# EAGLE board YunShield.v1.0 (EAGLE 6.1)
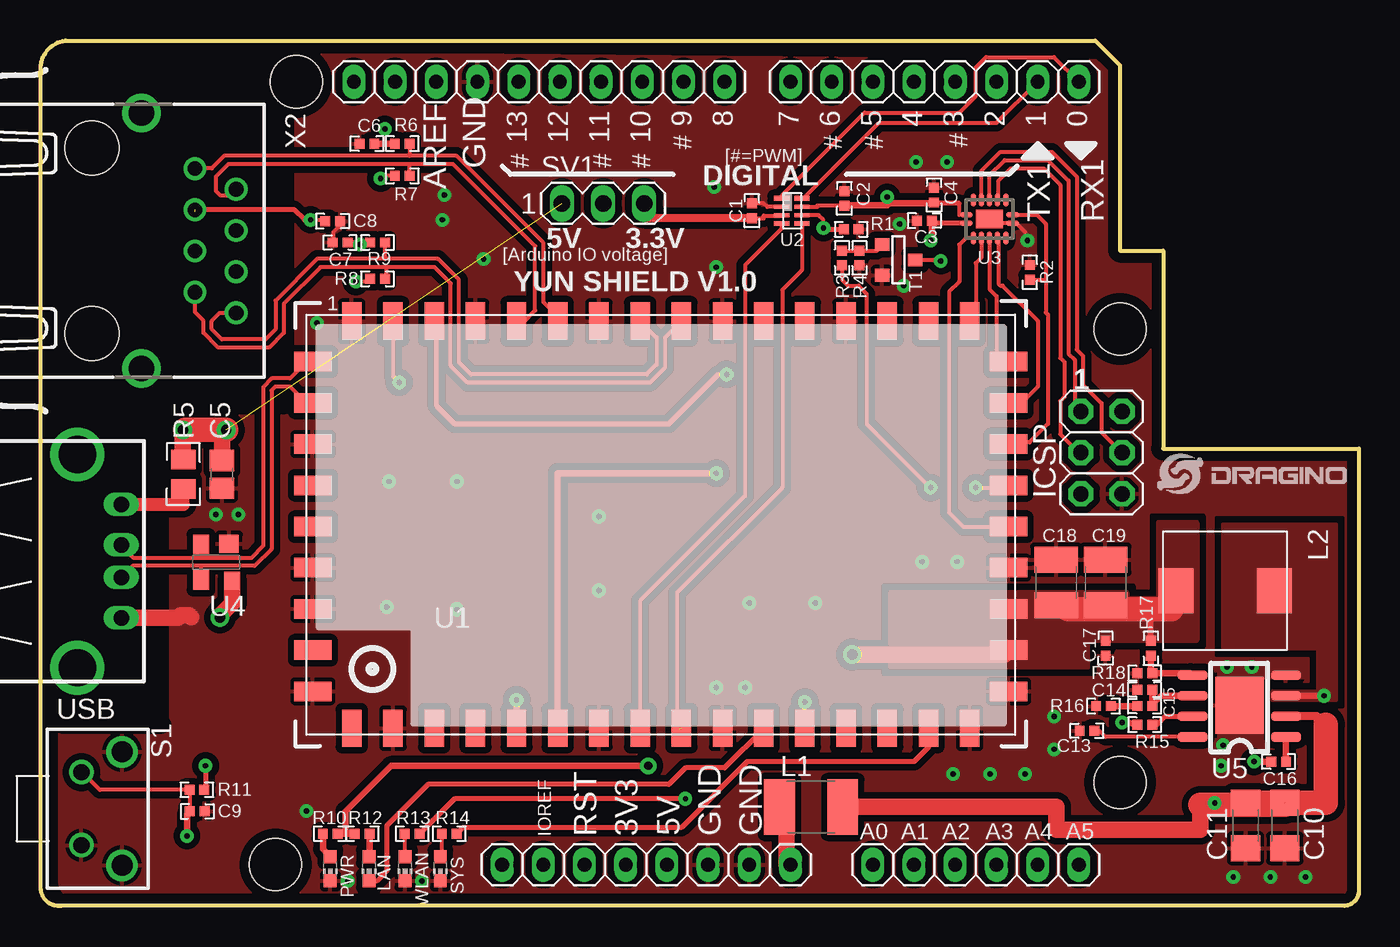
[diagram p0: board, top side]
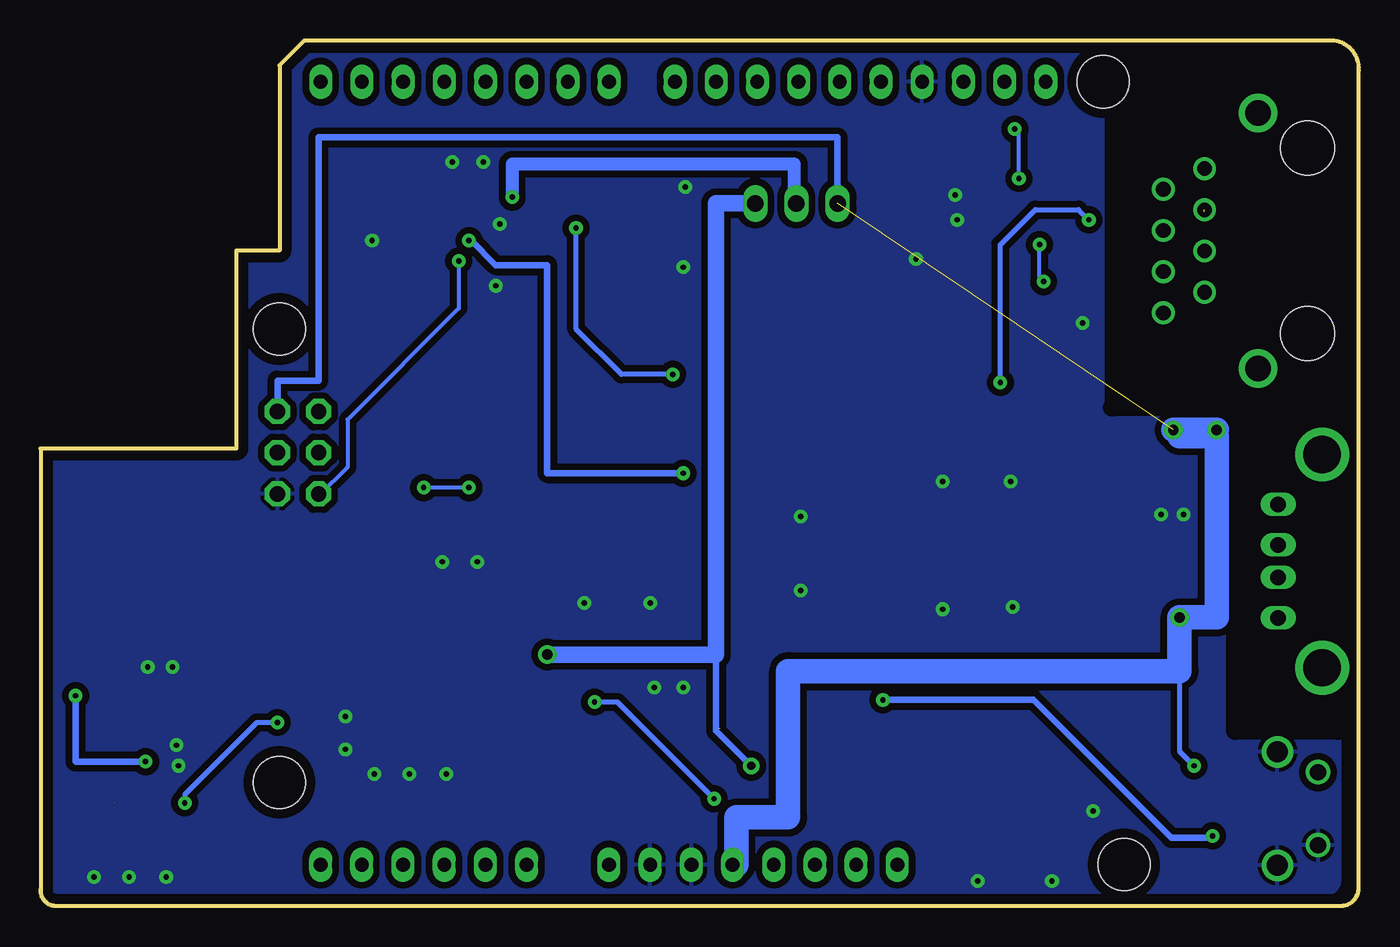
[diagram p1: board, bottom side, seen from below]

Size 81.3 x 53.35 mm. Coordinates in mm from the lower left corner, seen from the top.
Outline: 65.04,53.35 66.56,51.82 66.56,40.39 69.23,40.39 69.23,28.2 81.3,28.2 81.3,1.02 arc-90 80.41,0.01 1.27,0.01 arc-90 0.02,1.02 0.02,51.35 arc-90 1.52,53.35 65.04,53.35
Copper layers (1*16): Top 0.035mm / dielectric 1.5mm / Bottom 0.035mm
Design rules: minimum track width 10mil, minimum drill 22mil, track to track 10mil, track to pad 10mil, pad to pad 8mil, via to via 12mil, smd to smd 8mil, copper to edge 24mil, drill to drill 12mil, minimum pad ring 10mil, minimum via ring 10mil, stop-mask expansion 2mil, vias tented up to drill 30mil, thermal gap 10mil
Net classes: 0 default: width 0.254 mm, drill 0.61 mm, clearance 0.254 mm; 1 power: width 0.254 mm, drill 0.61 mm, clearance 0.254 mm; 2 gnd: width 0.254 mm, drill 0.61 mm, clearance 0.254 mm; 3 usbvcc: width 0.254 mm, drill 0.61 mm, clearance 0.254 mm; 4 aref: width 0.254 mm, drill 0.61 mm, clearance 0.254 mm; 5 usbtrace: width 0.254 mm, clearance 0.152 mm
Holes 3.2 mm at 66.56,35.57 66.56,7.63 15.76,50.81 14.49,2.55
tRestrict: area 1.2,11.2 to 15.1,52.6
bRestrict: area 1.2,10.8 to 15.3,52.6
vRestrict: area 43.1,38.6 to 43.6,38.9; area 36.3,35.2 to 37,35.7; area 45,35.2 to 45.7,35.7; area 41.8,35.2 to 42.3,35.7; area 48.4,10.3 to 49,10.8; area 50.9,10.2 to 51.5,11.1

## Footprints (pad centres in the part's own frame; a part is rotated, then mirrored left to right if it is on the bottom)
C0402 = smd 0.61 x 0.61: 1 -0.457,0; 2 0.457,0
C0805 = smd 1.3 x 1.5: 1 -0.85,0; 2 0.85,0
C1206 = smd 1.6 x 1.8: 1 -1.4,0; 2 1.4,0
C1210 = smd 1.6 x 2.7: 1 -1.4,0; 2 1.4,0
2X03 = drill 0.95 pad 1.55 octagon: 1 -2.54,-1.27; 2 -2.54,1.27; 3 0,-1.27; 4 0,1.27; 5 2.54,-1.27; 6 2.54,1.27
1X08 = drill 0.85 pad 1.422 long: 1 -8.89,0; 2 -6.35,0; 3 -3.81,0; 4 -1.27,0; 5 1.27,0; 6 3.81,0; 7 6.35,0; 8 8.89,0
1X06 = drill 0.85 pad 1.422 long: 1 -6.35,0; 2 -3.81,0; 3 -1.27,0; 4 1.27,0; 5 3.81,0; 6 6.35,0
1X10 = drill 0.85 pad 1.422 long: 1 -11.43,0; 2 -8.89,0; 3 -6.35,0; 4 -3.81,0; 5 -1.27,0; 6 1.27,0; 7 3.81,0; 8 6.35,0; 9 8.89,0; 10 11.43,0
L1812 = smd 1.9 x 3.4: 1 -1.95,0; 2 1.95,0
INDUCTOR-74 = smd 2.794 x 2.159: P$1 0,3.048; P$2 0,-3.048
CHIP-LED0603 = smd 0.8 x 0.8: A 0,-0.75; C 0,0.75
R0402 = smd 0.61 x 0.61: 1 -0.457,0; 2 0.457,0
R0805 = smd 1.2 x 1.5: 1 -0.9,0; 2 0.9,0
SWITCH_6X6X5 = drill 0.991 pad 1.524: 1 -2.25,0; 2 2.25,0 | drill 1.295 pad 1.905: 3 3.5,2.5; 4 -3.5,2.5
MA03-1 = drill 1.016 long: 1 -2.54,0; 2 0,0; 3 2.54,0
SOT-23 = smd 0.787 x 0.889: 1 0,-1.016; 2 -0.95,1.016; 3 0.95,1.016
HE50 = smd 1.2 x 2.3: 1 -19.05,12.55; 2 -16.51,12.55; 3 -13.97,12.55; 4 -11.43,12.55; 5 -8.89,12.55; 6 -6.35,12.55; 7 -3.81,12.55; 8 -1.27,12.55; 9 1.27,12.55; 10 3.81,12.55; 11 6.35,12.55; 12 8.89,12.55; 13 11.43,12.55; 14 13.97,12.55; 15 16.51,12.55; 16 19.05,12.55; 26 19.05,-12.55; 27 16.51,-12.55; 28 13.97,-12.55; 29 11.43,-12.55; 30 8.89,-12.55; 31 6.35,-12.55; 32 3.81,-12.55; 33 1.27,-12.55; 34 -1.27,-12.55; 35 -3.81,-12.55; 36 -6.35,-12.55; 37 -8.89,-12.55; 38 -11.43,-12.55; 39 -13.97,-12.55; 40 -16.51,-12.55; 41 -19.05,-12.55 | smd 2.3 x 1.2: 17 21.45,10.05; 18 21.45,7.51; 19 21.45,4.97; 20 21.45,2.43; 21 21.45,-0.11; 22 21.45,-2.65; 23 21.45,-5.19; 24 21.45,-7.73; 25 21.45,-10.27; 42 -21.45,-10.27; 43 -21.45,-7.73; 44 -21.45,-5.19; 45 -21.45,-2.65; 46 -21.45,-0.11; 47 -21.45,2.43; 48 -21.45,4.97; 49 -21.45,7.51; 50 -21.45,10.05
NXP-SOT833-1 = smd 1 x 0.3: 1 -0.614,0.778 | smd 0.95 x 0.25: 2 -0.639,0.253; 3 -0.639,-0.247; 6 0.611,-0.247; 7 0.611,0.253 | smd 0.95 x 0.3: 4 -0.639,-0.772; 5 0.611,-0.772; 8 0.611,0.778
DHVQFN14 = smd 0.8 x 0.35: 1 -1.425,-0.25; 7 1.425,-0.25; 8 1.425,0.25; 14 -1.425,0.25 | smd 0.35 x 0.8: 2 -1,-1.175; 3 -0.5,-1.175; 4 0,-1.175; 5 0.5,-1.175; 6 1,-1.175; 9 1,1.175; 10 0.5,1.175; 11 0,1.175; 12 -0.5,1.175; 13 -1,1.175 | smd 1.65 x 1.15: EXP 0,0
SOT143 = smd 1.194 x 1.118: 1 -0.72,-1.181 | smd 0.991 x 1.194: 2 1.007,-1.143; 3 1.007,1.067 | smd 0.991 x 1.118: 4 -0.923,1.105
RT8250-SOP8 = smd 1.88 x 0.61: 1 -1.219,0; 2 -1.219,-1.27; 3 -1.219,-2.54; 4 -1.219,-3.81; 5 4.547,-3.81; 6 4.547,-2.54; 7 4.547,-1.27; 8 4.547,0 | smd 2.997 x 3.505: 9 1.651,-1.956
PN87520 = drill 0.95 long: 1 -3.5,2.71; 2 -1,2.71; 3 1,2.71; 4 3.5,2.71 | drill 2.3: P$1 -6.57,0; P$2 6.57,0
RJ111BE = drill 0.9 pad 1.3: 1 -4.445,0; 2 -3.175,2.54; 3 -1.905,0; 4 -0.635,2.54; 5 0.635,0; 6 1.905,2.54; 7 3.175,0; 8 4.445,2.54 | drill 1.6 pad 2.184: M1 -7.875,-3.3; M2 7.875,-3.3 | hole 3.3: 5.715,-6.35; -5.715,-6.35

## Placement (x,y rotation side)
C1  0.1uF  [C0402]  43.87,42.85 270 top
C2  0.1uF  [C0402]  49.57,43.61 270 top
C3  0.1uF  [C0402]  54.5,42.25 0 top
C4  0.1uF  [C0402]  55.09,43.82 270 top
C5  10uF, 10V  [C0805]  11.19,26.61 270 top
C6  0.1u 10v  [C0402]  20.13,47 180 top
C7  0.1u 10v  [C0402]  18.47,40.9 180 top
C8  0.1u 10v  [C0402]  18.01,42.22 0 top
C9  0.1u NL  [C0402]  9.66,5.83 0 top
C10  10uF 25V  [C1206]  76.72,4.96 90 top
C11  10uF 25v NL  [C1206]  74.31,4.96 90 top
C13  0.1u 10V  [C0402]  64.53,10.8 180 top
C14  NL  [C0402]  68.09,13.34 180 top
C15  3900pF 25V  [C0402]  68.09,12.33 180 top
C16  0.01uF 16V  [C0402]  76.34,8.9 180 top
C17  NL  [C0402]  65.67,15.88 270 top
C18  22uF  [C1210]  62.63,19.95 90 top
C19  22uF  [C1210]  65.67,19.95 90 top
ICSP  ICSP  [2X03]  65.42,27.95 270 top
J2  8x1F-H8.5  [1X08]  55.13,50.81 180 top
J3  8x1F-H8.5  [1X08]  37.35,2.55 0 top
J4  6x1F-H8.5  [1X06]  57.67,2.55 0 top
JP1  10x1F-H8.5  [1X10]  30.75,50.81 180 top
L1  500ma  [L1812]  47.51,6.1 0 top
L2  10uH  [INDUCTOR-74]  73.04,19.44 270 top
LAN  Yellow  [CHIP-LED0603]  20.26,2.29 180 top
PWR  Yellow  [CHIP-LED0603]  17.87,2.29 180 top
R1  10k  [R0402]  49.99,41.71 180 top
R2  10k  [R0402]  61,39.06 270 top
R3  47k  [R0402]  49.43,39.94 270 top
R4  47k  [R0402]  50.51,39.94 270 top
R5  PTC  [R0805]  8.8,26.61 270 top
R6  49.9R  [R0402]  22.31,47 0 top
R7  49.9R  [R0402]  22.31,45.01 0 top
R8  49.9R  [R0402]  20.78,38.66 0 top
R9  49.9R  [R0402]  20.78,40.9 0 top
R10  330R  [R0402]  17.87,4.45 180 top
R11  100K  [R0402]  9.64,7.17 0 top
R12  330R  [R0402]  19.84,4.45 0 top
R13  270R  [R0402]  22.91,4.45 180 top
R14  270R  [R0402]  25.2,4.45 180 top
R15  100K  [R0402]  68.09,11.18 180 top
R16  6.81K  [R0402]  65.55,12.33 0 top
R17  26.1K  [R0402]  68.47,15.88 90 top
R18  10K  [R0402]  68.09,14.36 0 top
S1  [SWITCH_6X6X5]  2.52,6.01 270 top
SV1  [MA03-1]  34.69,43.31 0 top
SYS  Yellow  [CHIP-LED0603]  24.65,2.29 180 top
T1  AP2302GN-HF/SOT23  [SOT-23]  52.9,39.82 90 top
U1  HE  [HE50]  38.24,23.5 0 top
U2  NTB0102GT  [NXP-SOT833-1]  46.34,42.84 0 top
U3  NTB0104  [DHVQFN14]  58.52,42.35 0 top
U4  YSSR05  [SOT143]  10.9,21.15 180 top
U5  RT8250  [RT8250-SOP8]  75.58,10.42 180 top
U$1  LOGO-NEW  [LOGO-SILK-NEW]  68.85,25.41 0 top
USB  [PN87520]  2.27,21.26 270 top
WLAN  Yellow  [CHIP-LED0603]  22.47,2.29 180 top
X2  RJ111BE  [RJ111BE]  9.52,41.01 270 top

## Library data of the parts
C1-C11 C13-C19 L1 L2 LAN PWR R1-R18 S1 SYS U1-U5 U$1 WLAN = dragino
ICSP J2-J4 JP1 = SmartPrj
SV1 = con-lstb; OC_FARNELL: unknown; OC_NEWARK: unknown
T1 X2 = dragino; OC_FARNELL: unknown; OC_NEWARK: unknown
USB = con-berg; OC_FARNELL: unknown; OC_NEWARK: unknown

## Nets
2.5V: C3.2 U1.36 U3.1
+3V3: C1.2 C17.1 C18.1 C19.1 L2.P$2 R10.1 R12.1 R17.2 SV1.3 U1.23 U1.24 U2.3
+5V [usbvcc]: C5.1 ICSP.2 J3.5 R5.1 R11.2 SV1.1 U4.4
/RESET: ICSP.5 T1.1
CTRL_2.0V: C8.1 U1.2 X2.3
GND [gnd]: C1.1 C2.1 C3.1 C4.1 C5.2 C6.2 C7.2 C8.2 C9.2 C10.1 C11.1 C13.2 C14.2 C17.2 C18.2 C19.2 ICSP.6 J3.6 J3.7 JP1.7 PWR.C R1.1 R2.1 R4.2 R16.1 R18.1 S1.2 S1.3 S1.4 SYS.C T1.2 U1.1 U1.4 U1.7 U1.10 U1.13 U1.22 U1.25 U1.26 U1.32 U1.35 U1.40 U1.42 U1.44 U1.45 U1.48 U2.2 U3.7 U3.EXP U4.1 U5.4 U5.9 USB.4 WLAN.C
GPIO18: U1.18 U3.5
GPIO19: R2.2 U1.19 U3.8
GPIO20: R3.2 U1.20
GPIO21: U1.16 U3.3
GPIO22: U1.17 U3.4
GPIO23: U1.21 U3.2
GPIO24: R1.2 U1.3 U2.6
GPIO28: R14.1 U1.27
JUMPSTART: C9.1 R11.1 S1.1 U1.37
LED_P0: LAN.C U1.31
LED_WLAN: R13.1 U1.30
MISO: ICSP.1 U3.11
MOSI: ICSP.4 U3.12
N$1: R3.1 R4.1 T1.3
N$2: R5.2 USB.1
N$3: C6.1 R6.1 R7.1
N$4: PWR.A R10.2
N$5: C7.1 R8.1 R9.1
N$6: LAN.A R12.2
N$8: R13.2 WLAN.A
N$9: R14.2 SYS.A
N$10: C10.2 C11.2 L1.2 R15.2 U5.2
N$13: R15.1 U5.7
N$14: R17.1 R18.2 U5.5
N$15: C13.1 U5.8
N$17: C14.1 C15.1 U5.6
N$18: C15.2 R16.2
N$20: C16.1 U5.1
N$21: C16.2 L2.P$1 U5.3
OPTIONAL_ANT: U1.41
P0_RX_N: R9.2 U1.8 X2.8
P0_RX_P: R8.2 U1.9 X2.7
P0_TX_N: R7.2 U1.5 X2.2
P0_TX_P: R6.2 U1.6 X2.1
RX: J2.1 U2.1
SCK: ICSP.3 U3.10
SS: U3.13
TX: J2.2 U2.8
UART_RX: U1.33 U2.5
UART_TX: U1.34 U2.4
USB_N [usbtrace]: U1.50 U4.2 USB.2
USB_P [usbtrace]: U1.49 U4.3 USB.3
VDC [usbvcc]: C2.2 C4.2 SV1.2 U2.7 U3.14
VIN: J3.8 L1.1

## Tracks (layer width: path | path; a pad name or v marks a point on that pad's centre or on a via)
2.5V  (via drill 0.33)
  Top 0.305: U3.1 54.96,42.1 C3.2
  Top 0.406: 54.96,42.1 54.96,41.1 v54.88,41.03 | v41.67,26.68 31.89,26.68 31.89,11.06 31.9,11.06 U1.36
  Bottom 0.406: v54.88,41.03 54.75,41.03 53.23,39.5 50.05,39.5 50.05,26.68 v41.67,26.68
+3V3  (via drill 0.51, 0.64)
  Top 0.254: C1.2 44.59,42.39 44.59,42.55 45.7,42.55 U2.3 | 19.45,4.45 R12.1 19.32,4.45
  Top 0.381: R17.2 68.47,18.29
  Top 0.406: v37.48,8.64 21.61,8.64 18.81,5.85 18.81,4.45 | 18.81,4.45 19.32,4.45 | 18.81,4.45 R10.1
  Top 0.508: C1.2 37.35,42.39 37.35,43.31 SV1.3
  Top 1.016: U1.24 59.43,15.5 v50.05,15.5
  Top 1.524: L2.P$2 69.74,19.44 69.74,18.29 68.47,18.29 63.39,18.29
  Bottom 0.406: 39.64,15.5 39.64,10.8 v37.48,8.64
  Bottom 1.016: v50.05,15.5 39.64,15.5 39.64,43.31 SV1.3
  pour Top (no thermals): 52.47,19.31 66.94,19.31 66.94,18.93 68.98,18.93 68.98,23.63 71.26,23.63 71.26,16.39 64.53,16.39 64.53,14.74 52.47,14.74
+5V  (via drill 0.33, 0.64)  (1 unrouted)
  Top 0.305: v10.18,8.64 10.18,7.12 10.15,7.12 R11.2
  Top 1.016: v11.06,17.79 11.06,17.91 11.83,18.68 U4.4 | C5.1 11.19,29.08 v11.45,29.34 | 8.91,29.34 8.78,29.22 | v8.78,29.34 8.78,27.48 R5.1
  Top 1.524: v11.45,29.34 8.91,29.34
  Bottom 0.305: 11.06,14.48 11.06,9.53 v10.18,8.64
  Bottom 0.406: ICSP.2 66.69,32.39 64.15,32.39 64.15,47.38 32.15,47.38 SV1.1
  Bottom 1.016: J3.5 38.37,2.55 | 11.06,28.96 v11.45,29.34
  Bottom 1.524: 38.37,2.55 38.37,5.47 35.19,5.47 35.19,14.48 11.06,14.48 v11.06,17.79 8.78,17.79 8.78,28.96 11.06,28.96 | v11.45,29.34 v8.78,29.34
/RESET  (via drill 0.33)
  Top 0.254: T1.1 55.45,39.82 v55.51,39.76
  Bottom 0.254: v55.51,39.76 55.51,36.84 62.37,29.98 62.37,27.06 64.15,25.28 ICSP.5
CTRL_2.0V  (via drill 0.33)  (1 unrouted)
  Top 0.254: U1.2 21.74,32.64 v22.11,32.26 | v16.65,42.3 17.54,42.3 C8.1 | C8.1 | C8.1 17.54,42.17
  Top 0.305: v22.12,32.27 v22.11,32.26 | v16.65,42.3 16.27,42.3 15.64,42.93 9.67,42.93 9.54,42.81
  Bottom 0.305: v22.11,32.26 22.11,40.77 19.95,42.93 17.29,42.93 v16.65,42.3
GND  (via drill 0.33)
  Top 0.254: U3.EXP 58.77,42.1 U3.7 60.16,42.1 60.72,41.54 | C8.2 18.46,41.95 18.05,41.54 18.05,40.93 C7.2 | U2.2 44.81,43.09 44.59,43.31 43.96,43.31 43.95,43.31 C1.1
  Top 1.016: USB.4 8.5,17.76 8.65,17.91 9.16,17.91 9.29,17.79
  other vias: 16.4,5.85 18.94,1.53 23.51,1.53 73.55,1.78 75.83,1.78 77.99,1.78 73.17,14.74 74.69,14.74 72.91,9.91 72.79,8.64 56.28,8.13 58.56,8.13 60.72,8.13 62.5,9.66 62.5,11.69 41.67,13.47 43.45,13.47 56.53,21.22 54.37,21.22 53.23,38.23 52.97,42.04 55.9,45.85 60.85,41.03 53.99,45.85 41.54,44.33 10.81,24.14 12.21,24.14 34.43,24.01 34.43,19.44 21.48,26.17 25.67,26.17 21.35,18.42 25.67,18.29 43.7,18.68 47.77,18.68 41.67,39.38 27.32,39.88 24.78,42.3 24.91,43.82 17.03,35.95
  pour Bottom (isolate 0.406, rank 2): 1.16,52.71 86.88,52.71 86.88,0.64 2.16,0.64 arc-90 1.16,1.64
  pour Top (isolate 0.406, rank 2): 1.16,52.71 86.88,51.95 86.88,0.88 arc-90 70.77,0.39 2.29,0.39 arc-90 1.16,1.64
  pour Top (no thermals): 72.66,10.04 75.33,10.04 75.33,14.1 77.99,14.1 77.99,15.12 72.66,15.12
GPIO18
  Top 0.254: U3.5 59.07,41.17 59.07,38.36 59.2,38.23 59.32,38.23 61.48,36.07 61.48,32.01 60.72,31.25 60.09,31.25 59.71,30.87 59.71,31 U1.18
GPIO19
  Top 0.254: U3.8 61.44,42.6 61.99,42.04 61.99,38.61 | 61.99,38.61 61.99,36.58 62.12,36.46 62.12,29.72 60.98,28.58 59.81,28.58 U1.19 | R2.2 61.98,38.6 61.99,38.61
GPIO20  (via drill 0.33)
  Top 0.254: R3.2 49.43,38.61 49.8,38.23 50.43,38.23 50.94,37.73 50.94,29.72 v54.88,25.79 | v57.67,25.79 59.56,25.79 U1.20
  Bottom 0.254: v54.88,25.79 v57.67,25.79
GPIO21
  Top 0.254: U3.3 58.02,39.97 57.67,39.63 57.67,36.46 57.29,36.07 57.42,36.07 57.39,36.05 U1.16
GPIO22
  Top 0.254: U3.4 58.52,38.03 58.94,37.6 58.94,33.41 58.95,33.41 59.45,33.41 59.59,33.55 U1.17
GPIO23
  Top 0.254: U3.2 57.06,41.17 56.66,40.77 56.66,38.49 56.02,37.85 56.02,24.26 56.91,23.37 59.69,23.37 U1.21
GPIO24  (via drill 0.33)
  Top 0.254: v48.28,41.79 48.28,42.3 47.98,42.59 U2.6
  Top 0.305: U1.3 24.4,35.93 24.4,30.87 25.54,29.72 38.75,29.72 41.8,32.77 v42.31,32.77 | v48.28,41.79 48.36,41.71 R1.2
  Bottom 0.305: v42.31,32.77 45.48,32.77 48.28,35.57 v48.28,41.79
GPIO28
  Top 0.305: U1.27 54.76,9.79 53.86,8.9 43.58,8.9 39.51,4.83 26.04,4.83 R14.1
JUMPSTART  (via drill 0.33)
  Top 0.254: S1.1 2.55,8.26 2.56,8.26 3.65,7.17 R11.1 9.19,5.85 C9.1
  Top 0.406: U1.37 v29.36,12.7 v29.35,12.71 | v9.03,4.32 9.03,5.66 C9.1
  Bottom 0.406: v29.35,12.71 20.08,12.71 11.57,4.2 9.16,4.2 v9.03,4.32
LED_P0
  Top 0.305: U1.31 44.6,10.93 42.18,8.52 39.77,8.52 38.75,7.5 23.89,7.5 21.35,4.96 21.35,2.17 20.72,1.53 20.34,1.53 20.32,1.54 LAN.C
LED_WLAN  (via drill 0.33)
  Top 0.305: U1.30 v47.14,12.57 v47.13,12.58 | v39.77,6.61 25.53,6.61 R13.1
  Bottom 0.305: v47.13,12.58 45.74,12.58 v39.77,6.61
MISO
  Top 0.254: U3.11 58.52,45.04 59.45,45.98 62.12,45.98 63.39,44.71 63.39,34.04 63.77,33.66 63.77,30.87 ICSP.1
MOSI
  Top 0.254: U3.12 58.02,45.31 59.2,46.49 62.37,46.49 63.9,44.96 63.9,34.3 64.28,33.92 64.28,32.14 65.42,30.99 65.42,29.22 ICSP.4
N$1
  Top 0.254: R4.1 R3.1 49.54,40.4 49.55,40.39 50.5,40.39 R4.1 | R4.1 51.59,40.4 51.96,40.77 T1.3
N$2
  Top 0.813: USB.1 8.8,24.76 R5.2
N$3  (via drill 0.33)
  Top 0.254: R6.1 21.22,47 v21.22,47.89 | R7.1 21.14,45.01 v20.97,44.84
  Top 0.406: C6.1 R6.1
  Bottom 0.254: v20.97,44.84 20.97,47.63 v21.22,47.89
N$4
  Top 0.406: R10.2 17.41,3.5 PWR.A
N$5  (via drill 0.33)
  Top 0.254: R8.1 20.15,38.49 v19.45,38.49 | C7.1 19.57,40.9 v19.7,40.77 20.33,40.77 R9.1
  Bottom 0.254: v19.45,38.49 19.7,38.74 v19.7,40.77
N$6
  Top 0.406: R12.2 20.29,3.08 LAN.A
N$8
  Top 0.254: R13.2 22.46,3.05
  Top 0.305: 22.46,3.05 WLAN.A
N$9
  Top 0.254: R14.2 24.74,3.13 SYS.A
N$10  (via drill 0.33)  (1 unrouted)
  Top 0.305: R15.2 67.33,11.18 67.2,11.31 v66.69,11.31 | v72.41,6.36 72.41,6.23
  Top 0.406: 78.76,11.44 79.26,11.44 79.26,11.18
  Top 0.508: 78.76,11.44 78.76,11.69 U5.2
  Top 1.016: L1.2 62.63,6.1 62.63,4.71 71.52,4.71 71.52,6.23 | 76.72,6.23 C10.2
  Top 1.524: 71.52,6.23 72.41,6.23 76.72,6.23 | C11.2 C10.2 79.26,6.36 79.26,11.18
  Bottom 0.305: v66.69,11.31 67.96,11.31 72.41,6.86 v72.41,6.36
N$13
  Top 0.305: R15.1 68.85,11.18 69.36,11.69 70.88,11.69 71.01,11.56 71.01,11.67 U5.7
N$14
  Top 0.254: R18.2 68.54,14.41 68.53,14.42
  Top 0.406: R17.1 68.47,14.48 68.53,14.42 68.6,14.36 | R18.2 70.91,14.36 U5.5
N$15
  Top 0.254: U5.8 65.67,10.42 65.29,10.8 C13.1
N$17
  Top 0.254: C14.1 68.54,13.27 68.6,13.21
  Top 0.406: U5.6 69.1,12.96 68.6,12.45 68.6,13.21 | C14.1 C15.1
N$18
  Top 0.406: C15.2 R16.2
N$20
  Top 0.406: U5.1 C16.1
N$21  (via drill 0.33)
  Top 0.406: C16.2 v74.82,8.9 | v79.14,12.96 U5.3
  Bottom 0.406: v74.82,8.9 79.14,8.9 v79.14,12.96
  pour Top (no thermals): 75.96,12.71 79.9,12.71 79.9,23.5 72.91,23.5 72.91,15.88 78.76,15.88 78.76,13.21 75.96,13.21
P0_RX_N
  Top 0.254: U1.8 37.99,35.04 37.99,33.39 37.38,32.77 26.54,32.77 25.8,33.51 25.8,38.59 24.5,39.88 21.22,39.88 | 21.22,39.88 17.06,39.88 14.49,37.32 14.49,35.54 13.88,34.93 11.17,34.93 10.56,35.54 10.56,36.07 11.04,36.56 X2.8 | R9.2 21.22,40.88 21.22,39.88
P0_RX_P
  Top 0.254: U1.9 38.5,35.03 38.5,33.18 37.59,32.26 26.33,32.26 25.29,33.3 25.29,38.38 24.29,39.38 21.35,39.38 | 21.35,39.38 17.27,39.38 15,37.11 15,35.33 14.09,34.42 10.96,34.42 10.05,35.33 10.05,36.07 9.52,36.6 X2.7 | R8.2 21.35,38.77 21.35,39.38
P0_TX_N
  Top 0.254: 22.75,45.73 25.44,45.73 30.5,40.67 30.5,36.71 29.74,35.95 29.45,35.95 U1.5 | 22.75,45.73 11.57,45.73 10.81,44.96 10.81,44.08 11.06,43.82 11.7,43.82 X2.2 | R7.2 22.76,45.71 22.75,45.73
P0_TX_P
  Top 0.254: 22.75,46.23 25.65,46.23 31,40.88 31,37.22 32.28,35.94 32,35.94 U1.6 | 22.75,46.23 11.32,46.23 10.56,45.47 9.54,45.47 X2.1 | R6.2 22.76,46.25 22.75,46.23
RX
  Top 0.254: U2.1 45.72,43.81 50.82,48.9 56.66,48.9 57.67,49.92 57.67,51.7 58.31,52.33 62.5,52.33 J2.1
SCK
  Top 0.254: U3.10 59.07,43.52 59.07,44.71 59.83,45.47 61.86,45.47 62.88,44.46 62.88,33.79 63.13,33.53 63.13,31.38 62.88,31.12 62.88,29.09 64.15,27.82 ICSP.3
TX
  Top 0.254: U2.8 47.05,43.62 51.7,48.27 58.94,48.27 J2.2
UART_RX  (1 unrouted)
  Top 0.254: U2.5 46.95,39.19 45.74,37.98 45.74,25.79 39.26,19.31 39.26,11.06 39.39,10.93
UART_TX
  Top 0.254: U2.4 45.7,41.75 43.45,39.5 43.45,25.28 36.97,18.8 U1.34 36.97,10.94 36.97,10.67
USB_N
  Top 0.254: 9.67,21.44 12.99,21.44 13.73,22.21 13.73,31.99 14.26,32.52 15.38,32.52 16.41,33.55 U1.50 | 9.67,21.44 5.76,21.44 4.97,22.23 4.98,22.24 USB.2 | U4.2 9.67,22.3 9.67,21.44
USB_P
  Top 0.254: 9.92,20.96 13.2,20.96 14.24,22 14.24,31.78 14.47,32.01 15.38,32.01 16.39,31.01 U1.49 | 9.92,20.96 5.68,20.96 USB.3 | U4.3 9.9,20.94 9.92,20.96
VDC  (via drill 0.33)
  Top 0.254: 49.5,43.09 C2.2 | U2.7 47.89,43.09 47.89,43.19 49.57,43.19 C2.2 | U3.14 56.66,42.6 56.66,43.31 | C2.2 49.57,43.08 | 49.57,43.08 49.55,43.06 | 49.57,43.08 49.67,43.19 | C4.2 55.01,43.36 55.01,43.31
  Top 0.305: 56.66,43.31 55.01,43.31 54.96,43.31
  Top 0.406: v52.21,43.69 52.21,43.19 49.67,43.19 49.67,43.06 | 54.96,43.31 52.21,43.31 v52.21,43.69 | 52.21,43.82 v52.21,43.69
  Bottom 0.813: SV1.2 34.81,43.31 34.81,45.73 52.21,45.73 v52.21,43.69
VIN
  Top 1.016: J3.8 45.99,2.55 45.99,5.72 45.56,5.72 L1.1

## Text on the board
tPlace: 13 | 12 | 11 | 10 | 9 | 8 | 7 | 6 | 5 | 4 | 3 | 2 | 1 | 0
tNames: # | # | # | # | [#=PWM] | GND | # | # | # | AREF | DIGITAL | 5V | 3.3V | TX1 | RX1 | [Arduino IO voltage] | YUN SHIELD V1.0 | 1 | IOREF | RST | 3V3 | 5V | GND | GND | A0 | A1 | A2 | A3 | A4 | A5
ReferenceLC: X2